# Altium PCB ADAS_ECU_MB_revA.PcbDoc (part 6 of 6)
Units mm, origin at the board's own origin, x right, y up, seen from the top; angles counter-clockwise.
Board outline 180 x 120 mm, 6 copper layers (Top Layer, Mid Layer 1, Mid Layer 2, Mid Layer 3, Mid Layer 4, Bottom Layer), stack 1.554 mm thick; 648 components, 505 nets, 4389 pads, 80 vias.
Unrouted connection lines stored in the file: 197.
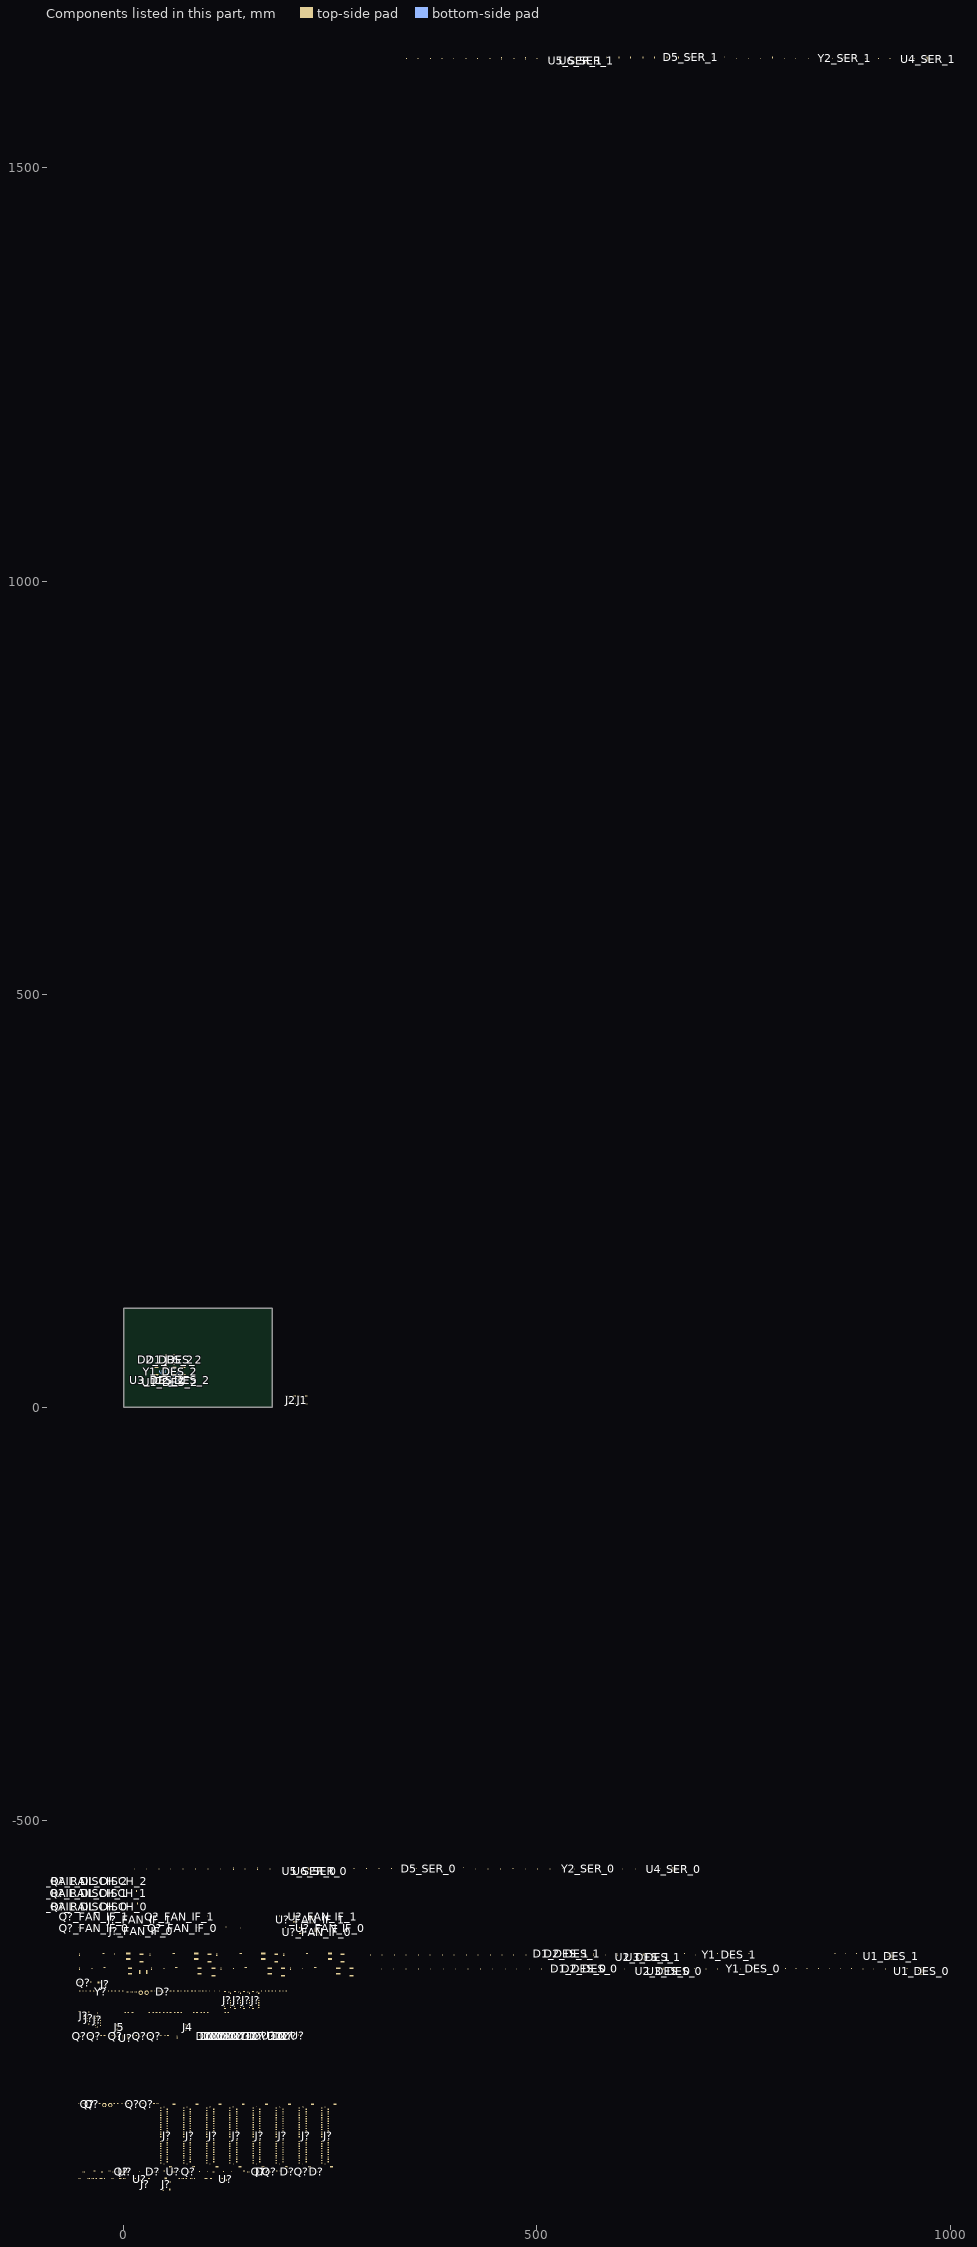
[diagram p5: the components of this part, seen from the top]

## Via types
v1: diameter 0.5, hole 0.2, Top Layer to Bottom Layer, 66 vias
v2: diameter 0.5, hole 0.3, Top Layer to Bottom Layer, 12 vias
v3: diameter 0.75, hole 0.5, Top Layer to Bottom Layer, 2 vias

## Nets (pads, with @x,y where several pads share a name; then routed paths per layer and width w, separated by ;. In a path a pad name is that pad's centre, name@x,y a point inside that pad or via, vN(x,y) a via of type N, cw(c..) or ccw(c..) an arc to the next point about the centre after c; other vN are vias at no path point) (continued)
pads on no net: C?.1@1.15,-732.081 C?.1@5.15,-732.081 C?.1@10.15,-732.081 C?.1@30.15,-732.081 C?.1@35.15,-732.081 C?.1@39.15,-732.081 C?.1@43.15,-732.081 C?.1@48.15,-732.081 C?.1@52.15,-732.081 C?.1@56.15,-732.081 C?.1@61.15,-732.081 C?.1@65.15,-732.081 C?.1@69.15,-732.081 C?.1@84.15,-732.081 C?.1@88.15,-732.081 C?.1@89.166,-932.081 C?.1@93.15,-732.081 C?.1@94.166,-932.081 C?.1@97.15,-732.081 C?.1@101.15,-732.081 C?.1@122.15,-732.081 C?.1@126.15,-732.081 C?.1@171.228,-924.081 C?.1@210.228,-924.081 C?.1@-10.834,-932.081 C?.2@2.107,-732.081 C?.2@6.107,-732.081 C?.2@11.107,-732.081 C?.2@31.107,-732.081 C?.2@36.107,-732.081 C?.2@40.107,-732.081 C?.2@44.107,-732.081 C?.2@49.107,-732.081 C?.2@53.107,-732.081 C?.2@57.107,-732.081 C?.2@62.107,-732.081 C?.2@66.107,-732.081 C?.2@70.107,-732.081 C?.2@75.995,-933.081 C?.2@85.107,-732.081 C?.2@85.995,-933.081 C?.2@89.107,-732.081 C?.2@94.107,-732.081 C?.2@98.107,-732.081 C?.2@102.107,-732.081 C?.2@123.107,-732.081 C?.2@127.107,-732.081 C?.2@137.058,-924.081 C?.2@175.995,-706.081 C?.2@183.995,-706.081 C?.2@188.995,-706.081 C?.2@196.995,-706.081 C?.2@-23.005,-933.081 C?_FAN_IF_0.2@177.628,-630.714 C?_FAN_IF_1.2@170.628,-616.714 D1_DES_0.2 D1_DES_0.4 D1_DES_0.7 D1_DES_0.9 D1_DES_1.2 D1_DES_1.4 D1_DES_1.7 D1_DES_1.9 D1_DES_2.2 D1_DES_2.4 D1_DES_2.7 D1_DES_2.9 D2_DES_0.2 D2_DES_0.4 D2_DES_0.7 D2_DES_0.9 D2_DES_1.2 D2_DES_1.4 D2_DES_1.7 D2_DES_1.9 D2_DES_2.2 D2_DES_2.4 D2_DES_2.7 D2_DES_2.9 D5_SER_0.2 D5_SER_0.4 D5_SER_0.5 D5_SER_0.6 D5_SER_0.7 D5_SER_0.9 D5_SER_1.2 D5_SER_1.4 D5_SER_1.5 D5_SER_1.6 D5_SER_1.7 D5_SER_1.9 D?.1@109.211,-760.081 D?.1@131.211,-760.081 D?.1@139.211,-760.081 D?.1@144.211,-760.081 D?.2@109.211,-760.581 D?.2@131.211,-760.581 D?.2@144.211,-760.581 D?.3@36.578,-925.081 D?.4@131.211,-761.581 D?.5@126.211,-762.081 D?.5@139.211,-762.081 D?.6@127.046,-762.081 D?.6@140.046,-762.081 D?.7@132.046,-761.581 D?.9@110.046,-760.581 D?.9@132.046,-760.581 D?.9@145.046,-760.581 D?.10@110.046,-760.081 D?.10@132.046,-760.081 D?.10@140.046,-760.081 D?.10@145.046,-760.081 FB?.2@18.628,-923.681 FB?.2@29.628,-923.681 FB?.2@52.628,-923.681 FB?.2@67.628,-923.681 FB?.2@91.628,-923.681 FB?.2@120.628,-923.681 FB?.2@130.628,-923.681 J?. J?.01 J?.1@72.528,-847.706 J?.1@100.528,-847.706 J?.1@128.528,-847.706 J?.1@133.728,-726.331 J?.1@144.728,-726.331 J?.1@155.728,-726.331 J?.1@156.528,-847.706 J?.1@184.528,-847.706 J?.1@212.528,-847.706 J?.1@239.528,-847.706 J?.02 J?.2@52.728,-847.956 J?.2@108.728,-847.956 J?.2@129.278,-726.081 J?.2@136.728,-847.956 J?.2@152.278,-726.081 J?.2@163.278,-726.081 J?.2@164.728,-847.956 J?.2@192.728,-847.956 J?.2@220.728,-847.956 J?.2@247.728,-847.956 J?.2@-23.197,-698.731 J?.03 J?.3@72.528,-848.206 J?.3@100.528,-848.206 J?.3@128.528,-848.206 J?.3@133.728,-725.831 J?.3@144.728,-725.831 J?.3@155.728,-725.831 J?.3@156.528,-848.206 J?.3@184.528,-848.206 J?.3@212.528,-848.206 J?.3@239.528,-848.206 J?.3@-23.197,-698.081 J?.3@-44.452,-735.871 J?.3@-48.372,-734.811 J?.04 J?.4@52.728,-848.456 J?.4@108.728,-848.456 J?.4@129.278,-725.581 J?.4@136.728,-848.456 J?.4@152.278,-725.581 J?.4@163.278,-725.581 J?.4@164.728,-848.456 J?.4@192.728,-848.456 J?.4@220.728,-848.456 J?.4@247.728,-848.456 J?.4@-23.197,-697.431 J?.4@-48.372,-732.271 J?.05 J?.5@72.528,-848.706 J?.5@100.528,-848.706 J?.5@128.528,-848.706 J?.5@133.728,-725.331 J?.5@144.728,-725.331 J?.5@155.728,-725.331 J?.5@156.528,-848.706 J?.5@184.528,-848.706 J?.5@212.528,-848.706 J?.5@239.528,-848.706 J?.06 J?.6@52.728,-848.956 J?.6@108.728,-848.956 J?.6@129.278,-725.081 J?.6@136.728,-848.956 J?.6@141.278,-725.081 J?.6@152.278,-725.081 J?.6@163.278,-725.081 J?.6@164.728,-848.956 J?.6@192.728,-848.956 J?.6@220.728,-848.956 J?.6@247.728,-848.956 J?.07 J?.7@72.528,-849.206 J?.7@100.528,-849.206 J?.7@128.528,-849.206 J?.7@133.728,-724.831 J?.7@144.728,-724.831 J?.7@155.728,-724.831 J?.7@156.528,-849.206 J?.7@184.528,-849.206 J?.7@212.528,-849.206 J?.7@239.528,-849.206 J?.08 J?.8@52.728,-849.456 J?.8@108.728,-849.456 J?.8@129.278,-724.581 J?.8@136.728,-849.456 J?.8@141.278,-724.581 J?.8@152.278,-724.581 J?.8@163.278,-724.581 J?.8@164.728,-849.456 J?.8@192.728,-849.456 J?.8@220.728,-849.456 J?.8@247.728,-849.456 J?.09 J?.9@44.528,-849.706 J?.9@72.528,-849.706 J?.9@100.528,-849.706 J?.9@128.528,-849.706 J?.9@133.728,-724.331 J?.9@144.728,-724.331 J?.9@155.728,-724.331 J?.9@156.528,-849.706 J?.9@184.528,-849.706 J?.9@212.528,-849.706 J?.9@239.528,-849.706 J?.10@52.728,-849.956 J?.10@108.728,-849.956 J?.10@129.278,-724.081 J?.10@136.728,-849.956 J?.10@152.278,-724.081 J?.10@163.278,-724.081 J?.10@164.728,-849.956 J?.10@192.728,-849.956 J?.10@220.728,-849.956 J?.10@247.728,-849.956 J?.10@-28.282,-745.331 J?.11@44.528,-850.206 J?.11@72.528,-850.206 J?.11@100.528,-850.206 J?.11@128.528,-850.206 J?.11@133.728,-723.831 J?.11@144.728,-723.831 J?.11@155.728,-723.831 J?.11@156.528,-850.206 J?.11@184.528,-850.206 J?.11@212.528,-850.206 J?.11@239.528,-850.206 J?.11@-34.462,-744.831 J?.12@52.728,-850.456 J?.12@108.728,-850.456 J?.12@129.278,-723.581 J?.12@136.728,-850.456 J?.12@152.278,-723.581 J?.12@163.278,-723.581 J?.12@164.728,-850.456 J?.12@192.728,-850.456 J?.12@220.728,-850.456 J?.12@247.728,-850.456 J?.12@-28.282,-744.831 J?.13@72.528,-850.706 J?.13@100.528,-850.706 J?.13@128.528,-850.706 J?.13@133.728,-723.331 J?.13@144.728,-723.331 J?.13@155.728,-723.331 J?.13@156.528,-850.706 J?.13@184.528,-850.706 J?.13@212.528,-850.706 J?.13@239.528,-850.706 J?.13@-34.462,-743.831 J?.14@52.728,-850.956 J?.14@108.728,-850.956 J?.14@129.278,-723.081 J?.14@136.728,-850.956 J?.14@152.278,-723.081 J?.14@163.278,-723.081 J?.14@164.728,-850.956 J?.14@192.728,-850.956 J?.14@220.728,-850.956 J?.14@247.728,-850.956 J?.14@-28.282,-743.831 J?.14@-44.452,-741.371 J?.15@72.528,-851.206 J?.15@100.528,-851.206 J?.15@128.528,-851.206 J?.15@133.728,-722.831 J?.15@144.728,-722.831 J?.15@155.728,-722.831 J?.15@156.528,-851.206 J?.15@184.528,-851.206 J?.15@212.528,-851.206 J?.15@239.528,-851.206 J?.15@-34.462,-743.331 J?.16@52.728,-851.456 J?.16@108.728,-851.456 J?.16@129.278,-722.581 J?.16@136.728,-851.456 J?.16@152.278,-722.581 J?.16@163.278,-722.581 J?.16@164.728,-851.456 J?.16@192.728,-851.456 J?.16@220.728,-851.456 J?.16@247.728,-851.456 J?.16@-28.282,-743.331 J?.17@72.528,-851.706 J?.17@100.528,-851.706 J?.17@128.528,-851.706 J?.17@133.728,-722.331 J?.17@144.728,-722.331 J?.17@155.728,-722.331 J?.17@156.528,-851.706 J?.17@184.528,-851.706 J?.17@212.528,-851.706 J?.17@239.528,-851.706 J?.17@-34.462,-742.331 J?.18@52.728,-851.956 J?.18@108.728,-851.956 J?.18@129.278,-722.081 J?.18@136.728,-851.956 J?.18@152.278,-722.081 J?.18@163.278,-722.081 J?.18@164.728,-851.956 J?.18@192.728,-851.956 J?.18@220.728,-851.956 J?.18@247.728,-851.956 J?.18@-28.282,-742.331 J?.19@72.528,-852.206 J?.19@100.528,-852.206 J?.19@128.528,-852.206 J?.19@133.728,-721.831 J?.19@144.728,-721.831 J?.19@155.728,-721.831 J?.19@156.528,-852.206 J?.19@184.528,-852.206 J?.19@212.528,-852.206 J?.19@239.528,-852.206 J?.19@-34.462,-741.831 J?.20@52.728,-852.456 J?.20@108.728,-852.456 J?.20@129.278,-721.581 J?.20@136.728,-852.456 J?.20@141.278,-721.581 J?.20@152.278,-721.581 J?.20@163.278,-721.581 J?.20@164.728,-852.456 J?.20@192.728,-852.456 J?.20@220.728,-852.456 J?.20@247.728,-852.456 J?.20@-28.282,-741.831 J?.21@72.528,-852.706 J?.21@100.528,-852.706 J?.21@128.528,-852.706 J?.21@133.728,-721.331 J?.21@144.728,-721.331 J?.21@155.728,-721.331 J?.21@156.528,-852.706 J?.21@184.528,-852.706 J?.21@212.528,-852.706 J?.21@239.528,-852.706 J?.21@-34.462,-740.831 J?.22@52.728,-852.956 J?.22@108.728,-852.956 J?.22@129.278,-721.081 J?.22@136.728,-852.956 J?.22@141.278,-721.081 J?.22@152.278,-721.081 J?.22@163.278,-721.081 J?.22@164.728,-852.956 J?.22@192.728,-852.956 J?.22@220.728,-852.956 J?.22@247.728,-852.956 J?.22@-28.282,-740.831 J?.23@72.528,-853.206 J?.23@100.528,-853.206 J?.23@128.528,-853.206 J?.23@133.728,-720.831 J?.23@144.728,-720.831 J?.23@155.728,-720.831 J?.23@156.528,-853.206 J?.23@184.528,-853.206 J?.23@212.528,-853.206 J?.23@239.528,-853.206 J?.23@-34.462,-740.331 J?.24@52.728,-853.456 J?.24@108.728,-853.456 J?.24@129.278,-720.581 J?.24@136.728,-853.456 J?.24@141.278,-720.581 J?.24@152.278,-720.581 J?.24@163.278,-720.581 J?.24@164.728,-853.456 J?.24@192.728,-853.456 J?.24@220.728,-853.456 J?.24@247.728,-853.456 J?.24@-28.282,-740.331 J?.25@72.528,-853.706 J?.25@100.528,-853.706 J?.25@128.528,-853.706 J?.25@133.728,-720.331 J?.25@144.728,-720.331 J?.25@155.728,-720.331 J?.25@156.528,-853.706 J?.25@184.528,-853.706 J?.25@212.528,-853.706 J?.25@239.528,-853.706 J?.25@-34.462,-739.331 J?.26@52.728,-853.956 J?.26@108.728,-853.956 J?.26@129.278,-720.081 J?.26@136.728,-853.956 J?.26@141.278,-720.081 J?.26@152.278,-720.081 J?.26@163.278,-720.081 J?.26@164.728,-853.956 J?.26@192.728,-853.956 J?.26@220.728,-853.956 J?.26@247.728,-853.956 J?.26@-28.282,-739.331 J?.27@44.528,-854.206 J?.27@72.528,-854.206 J?.27@100.528,-854.206 J?.27@128.528,-854.206 J?.27@133.728,-719.831 J?.27@144.728,-719.831 J?.27@155.728,-719.831 J?.27@156.528,-854.206 J?.27@184.528,-854.206 J?.27@212.528,-854.206 J?.27@239.528,-854.206 J?.27@-34.462,-738.831 J?.28@52.728,-854.456 J?.28@108.728,-854.456 J?.28@129.278,-719.581 J?.28@136.728,-854.456 J?.28@141.278,-719.581 J?.28@152.278,-719.581 J?.28@163.278,-719.581 J?.28@164.728,-854.456 J?.28@192.728,-854.456 J?.28@220.728,-854.456 J?.28@247.728,-854.456 J?.28@-28.282,-738.831 J?.29@44.528,-854.706 J?.29@72.528,-854.706 J?.29@100.528,-854.706 J?.29@128.528,-854.706 J?.29@133.728,-719.331 J?.29@144.728,-719.331 J?.29@155.728,-719.331 J?.29@156.528,-854.706 J?.29@184.528,-854.706 J?.29@212.528,-854.706 J?.29@239.528,-854.706 J?.29@-34.462,-737.831 J?.30@52.728,-854.956 J?.30@108.728,-854.956 J?.30@129.278,-719.081 J?.30@136.728,-854.956 J?.30@141.278,-719.081 J?.30@152.278,-719.081 J?.30@163.278,-719.081 J?.30@164.728,-854.956 J?.30@192.728,-854.956 J?.30@220.728,-854.956 J?.30@247.728,-854.956 J?.30@-28.282,-737.831 J?.31@72.528,-855.206 J?.31@100.528,-855.206 J?.31@128.528,-855.206 J?.31@133.728,-718.831 J?.31@144.728,-718.831 J?.31@155.728,-718.831 J?.31@156.528,-855.206 J?.31@184.528,-855.206 J?.31@212.528,-855.206 J?.31@239.528,-855.206 J?.31@-34.462,-737.331 J?.32@52.728,-855.456 J?.32@108.728,-855.456 J?.32@129.278,-718.581 J?.32@136.728,-855.456 J?.32@141.278,-718.581 J?.32@152.278,-718.581 J?.32@163.278,-718.581 J?.32@164.728,-855.456 J?.32@192.728,-855.456 J?.32@220.728,-855.456 J?.32@247.728,-855.456 J?.32@-28.282,-737.331 J?.33@72.528,-855.706 J?.33@100.528,-855.706 J?.33@128.528,-855.706 J?.33@133.728,-718.331 J?.33@144.728,-718.331 J?.33@155.728,-718.331 J?.33@156.528,-855.706 J?.33@184.528,-855.706 J?.33@212.528,-855.706 J?.33@239.528,-855.706 J?.33@-34.462,-736.331 J?.34@52.728,-855.956 J?.34@108.728,-855.956 J?.34@129.278,-718.081 J?.34@136.728,-855.956 J?.34@141.278,-718.081 J?.34@152.278,-718.081 J?.34@163.278,-718.081 J?.34@164.728,-855.956 J?.34@192.728,-855.956 J?.34@220.728,-855.956 J?.34@247.728,-855.956 J?.34@-28.282,-736.331 J?.35@72.528,-856.206 J?.35@100.528,-856.206 J?.35@128.528,-856.206 J?.35@133.728,-717.831 J?.35@144.728,-717.831 J?.35@155.728,-717.831 J?.35@156.528,-856.206 J?.35@184.528,-856.206 J?.35@212.528,-856.206 J?.35@239.528,-856.206 J?.35@-34.462,-735.831 J?.36@52.728,-856.456 J?.36@108.728,-856.456 J?.36@129.278,-717.581 J?.36@136.728,-856.456 J?.36@141.278,-717.581 J?.36@152.278,-717.581 J?.36@163.278,-717.581 J?.36@164.728,-856.456 J?.36@192.728,-856.456 J?.36@220.728,-856.456 J?.36@247.728,-856.456 J?.36@-28.282,-735.831 J?.37@72.528,-856.706 J?.37@100.528,-856.706 J?.37@121.728,-717.331 J?.37@128.528,-856.706 J?.37@133.728,-717.331 J?.37@155.728,-717.331 J?.37@156.528,-856.706 J?.37@184.528,-856.706 J?.37@212.528,-856.706 J?.37@239.528,-856.706 J?.37@-34.462,-734.831 J?.38@52.728,-856.956 J?.38@108.728,-856.956 J?.38@129.278,-717.081 J?.38@136.728,-856.956 J?.38@141.278,-717.081 J?.38@152.278,-717.081 J?.38@163.278,-717.081 J?.38@164.728,-856.956 J?.38@192.728,-856.956 J?.38@220.728,-856.956 J?.38@247.728,-856.956 J?.38@-28.282,-734.831 J?.39@44.528,-857.206 J?.39@72.528,-857.206 J?.39@100.528,-857.206 J?.39@121.728,-716.831 J?.39@128.528,-857.206 J?.39@133.728,-716.831 J?.39@155.728,-716.831 J?.39@156.528,-857.206 J?.39@184.528,-857.206 J?.39@212.528,-857.206 J?.39@239.528,-857.206 J?.39@-34.462,-734.331 J?.40@52.728,-857.456 J?.40@80.728,-857.456 J?.40@108.728,-857.456 J?.40@129.278,-716.581 J?.40@136.728,-857.456 J?.40@141.278,-716.581 J?.40@152.278,-716.581 J?.40@164.728,-857.456 J?.40@192.728,-857.456 J?.40@220.728,-857.456 J?.40@247.728,-857.456 J?.40@-28.282,-734.331 J?.41@44.528,-857.706 J?.41@72.528,-857.706 J?.41@100.528,-857.706 J?.41@121.728,-716.331 J?.41@128.528,-857.706 J?.41@133.728,-716.331 J?.41@155.728,-716.331 J?.41@156.528,-857.706 J?.41@184.528,-857.706 J?.41@212.528,-857.706 J?.41@239.528,-857.706 J?.42@52.728,-857.956 J?.42@80.728,-857.956 J?.42@108.728,-857.956 J?.42@129.278,-716.081 J?.42@136.728,-857.956 J?.42@141.278,-716.081 J?.42@152.278,-716.081 J?.42@164.728,-857.956 J?.42@192.728,-857.956 J?.42@220.728,-857.956 J?.42@247.728,-857.956 J?.43@72.528,-858.206 J?.43@100.528,-858.206 J?.43@121.728,-715.831 J?.43@128.528,-858.206 J?.43@133.728,-715.831 J?.43@155.728,-715.831 J?.43@156.528,-858.206 J?.43@184.528,-858.206 J?.43@212.528,-858.206 J?.43@239.528,-858.206 J?.44@52.728,-858.456 J?.44@108.728,-858.456 J?.44@129.278,-715.581 J?.44@136.728,-858.456 J?.44@141.278,-715.581 J?.44@152.278,-715.581 J?.44@164.728,-858.456 J?.44@192.728,-858.456 J?.44@220.728,-858.456 J?.44@247.728,-858.456 J?.45@44.528,-858.706 J?.45@72.528,-858.706 J?.45@100.528,-858.706 J?.45@121.728,-715.331 J?.45@128.528,-858.706 J?.45@133.728,-715.331 J?.45@155.728,-715.331 J?.45@156.528,-858.706 J?.45@184.528,-858.706 J?.45@212.528,-858.706 J?.45@239.528,-858.706 J?.46 J?.47@44.528,-859.206 J?.47@72.528,-859.206 J?.47@100.528,-859.206 J?.47@121.728,-714.831 J?.47@128.528,-859.206 J?.47@133.728,-714.831 J?.47@155.728,-714.831 J?.47@156.528,-859.206 J?.47@184.528,-859.206 J?.47@212.528,-859.206 J?.47@239.528,-859.206 J?.48 J?.49@72.528,-859.706 J?.49@100.528,-859.706 J?.49@121.728,-714.331 J?.49@128.528,-859.706 J?.49@133.728,-714.331 J?.49@155.728,-714.331 J?.49@156.528,-859.706 J?.49@184.528,-859.706 J?.49@212.528,-859.706 J?.49@239.528,-859.706 J?.50@52.728,-859.956 J?.50@108.728,-859.956 J?.50@129.278,-714.081 J?.50@136.728,-859.956 J?.50@141.278,-714.081 J?.50@152.278,-714.081 J?.50@164.728,-859.956 J?.50@192.728,-859.956 J?.50@220.728,-859.956 J?.50@247.728,-859.956 J?.51@44.528,-860.206 J?.51@72.528,-860.206 J?.51@100.528,-860.206 J?.51@121.728,-713.831 J?.51@128.528,-860.206 J?.51@133.728,-713.831 J?.51@155.728,-713.831 J?.51@156.528,-860.206 J?.51@184.528,-860.206 J?.51@212.528,-860.206 J?.51@239.528,-860.206 J?.52@52.728,-860.456 J?.52@80.728,-860.456 J?.52@108.728,-860.456 J?.52@129.278,-713.581 J?.52@136.728,-860.456 J?.52@141.278,-713.581 J?.52@152.278,-713.581 J?.52@164.728,-860.456 J?.52@192.728,-860.456 J?.52@220.728,-860.456 J?.52@247.728,-860.456 J?.53@44.528,-860.706 J?.53@72.528,-860.706 J?.53@100.528,-860.706 J?.53@121.728,-713.331 J?.53@128.528,-860.706 J?.53@133.728,-713.331 J?.53@155.728,-713.331 J?.53@156.528,-860.706 J?.53@184.528,-860.706 J?.53@212.528,-860.706 J?.53@239.528,-860.706 J?.54@52.728,-860.956 J?.54@80.728,-860.956 J?.54@108.728,-860.956 J?.54@129.278,-713.081 J?.54@136.728,-860.956 J?.54@141.278,-713.081 J?.54@152.278,-713.081 J?.54@164.728,-860.956 J?.54@192.728,-860.956 J?.54@220.728,-860.956 J?.54@247.728,-860.956 J?.55@72.528,-861.206 J?.55@100.528,-861.206 J?.55@121.728,-712.831 J?.55@128.528,-861.206 J?.55@133.728,-712.831 J?.55@155.728,-712.831 J?.55@156.528,-861.206 J?.55@184.528,-861.206 J?.55@212.528,-861.206 J?.55@239.528,-861.206 J?.56@52.728,-861.456 J?.56@108.728,-861.456 J?.56@129.278,-712.581 J?.56@136.728,-861.456 J?.56@141.278,-712.581 J?.56@152.278,-712.581 J?.56@163.278,-712.581 J?.56@164.728,-861.456 J?.56@192.728,-861.456 J?.56@220.728,-861.456 J?.56@247.728,-861.456 J?.57@44.528,-861.706 J?.57@72.528,-861.706 J?.57@100.528,-861.706 J?.57@121.728,-712.331 J?.57@128.528,-861.706 J?.57@133.728,-712.331 J?.57@155.728,-712.331 J?.57@156.528,-861.706 J?.57@184.528,-861.706 J?.57@212.528,-861.706 J?.57@239.528,-861.706 J?.58 J?.59 J?.60 J?.61@72.528,-862.706 J?.61@100.528,-862.706 J?.61@128.528,-862.706 J?.61@156.528,-862.706 J?.61@184.528,-862.706 J?.61@212.528,-862.706 J?.61@239.528,-862.706 J?.62@52.728,-862.956 J?.62@108.728,-862.956 J?.62@136.728,-862.956 J?.62@164.728,-862.956 J?.62@192.728,-862.956 J?.62@220.728,-862.956 J?.62@247.728,-862.956 J?.63@72.528,-863.206 J?.63@100.528,-863.206 J?.63@128.528,-863.206 J?.63@156.528,-863.206 J?.63@184.528,-863.206 J?.63@212.528,-863.206 J?.63@239.528,-863.206 J?.64 J?.65@72.528,-863.706 J?.65@100.528,-863.706 J?.65@128.528,-863.706 J?.65@156.528,-863.706 J?.65@184.528,-863.706 J?.65@212.528,-863.706 J?.65@239.528,-863.706 J?.66 J?.67@72.528,-864.206 J?.67@100.528,-864.206 J?.67@121.728,-709.831 J?.67@128.528,-864.206 J?.67@133.728,-709.831 J?.67@144.728,-709.831 J?.67@155.728,-709.831 J?.67@156.528,-864.206 J?.67@184.528,-864.206 J?.67@212.528,-864.206 J?.67@239.528,-864.206 J?.68@52.728,-864.456 J?.68@108.728,-864.456 J?.68@129.278,-709.581 J?.68@136.728,-864.456 J?.68@141.278,-709.581 J?.68@152.278,-709.581 J?.68@164.728,-864.456 J?.68@192.728,-864.456 J?.68@220.728,-864.456 J?.68@247.728,-864.456 J?.69@72.528,-864.706 J?.69@100.528,-864.706 J?.69@121.728,-709.331 J?.69@128.528,-864.706 J?.69@133.728,-709.331 J?.69@144.728,-709.331 J?.69@155.728,-709.331 J?.69@156.528,-864.706 J?.69@184.528,-864.706 J?.69@212.528,-864.706 J?.69@239.528,-864.706 J?.70@52.728,-864.956 J?.70@80.728,-864.956 J?.70@108.728,-864.956 J?.70@129.278,-709.081 J?.70@136.728,-864.956 J?.70@141.278,-709.081 J?.70@152.278,-709.081 J?.70@164.728,-864.956 J?.70@192.728,-864.956 J?.70@220.728,-864.956 J?.70@247.728,-864.956 J?.71@72.528,-865.206 J?.71@100.528,-865.206 J?.71@121.728,-708.831 J?.71@128.528,-865.206 J?.71@133.728,-708.831 J?.71@155.728,-708.831 J?.71@156.528,-865.206 J?.71@184.528,-865.206 J?.71@212.528,-865.206 J?.71@239.528,-865.206 J?.72@52.728,-865.456 J?.72@80.728,-865.456 J?.72@108.728,-865.456 J?.72@129.278,-708.581 J?.72@136.728,-865.456 J?.72@141.278,-708.581 J?.72@152.278,-708.581 J?.72@164.728,-865.456 J?.72@192.728,-865.456 J?.72@220.728,-865.456 J?.72@247.728,-865.456 J?.73@72.528,-865.706 J?.73@100.528,-865.706 J?.73@121.728,-708.331 J?.73@128.528,-865.706 J?.73@133.728,-708.331 J?.73@155.728,-708.331 J?.73@156.528,-865.706 J?.73@184.528,-865.706 J?.73@212.528,-865.706 J?.73@239.528,-865.706 J?.74@52.728,-865.956 J?.74@108.728,-865.956 J?.74@129.278,-708.081 J?.74@136.728,-865.956 J?.74@141.278,-708.081 J?.74@152.278,-708.081 J?.74@164.728,-865.956 J?.74@192.728,-865.956 J?.74@220.728,-865.956 J?.74@247.728,-865.956 J?.75@72.528,-866.206 J?.75@100.528,-866.206 J?.75@121.728,-707.831 J?.75@128.528,-866.206 J?.75@133.728,-707.831 J?.75@155.728,-707.831 J?.75@156.528,-866.206 J?.75@184.528,-866.206 J?.75@212.528,-866.206 J?.75@239.528,-866.206 J?.76@52.728,-866.456 J?.76@80.728,-866.456 J?.76@108.728,-866.456 J?.76@122.503,-727.431 J?.76@134.503,-727.431 J?.76@136.728,-866.456 J?.76@145.503,-727.431 J?.76@164.728,-866.456 J?.76@192.728,-866.456 J?.76@220.728,-866.456 J?.76@247.728,-866.456 J?.77@72.528,-866.706 J?.77@100.528,-866.706 J?.77@122.503,-706.731 J?.77@128.528,-866.706 J?.77@134.503,-706.731 J?.77@156.503,-706.731 J?.77@156.528,-866.706 J?.77@184.528,-866.706 J?.77@212.528,-866.706 J?.77@239.528,-866.706 J?.78 J?.79@72.528,-867.206 J?.79@100.528,-867.206 J?.79@128.528,-867.206 J?.79@156.528,-867.206 J?.79@184.528,-867.206 J?.79@212.528,-867.206 J?.79@239.528,-867.206 J?.80@52.728,-867.456 J?.80@108.728,-867.456 J?.80@136.728,-867.456 J?.80@164.728,-867.456 J?.80@192.728,-867.456 J?.80@220.728,-867.456 J?.80@247.728,-867.456 J?.81@44.528,-867.706 J?.81@72.528,-867.706 J?.81@128.528,-867.706 J?.81@156.528,-867.706 J?.81@184.528,-867.706 J?.81@212.528,-867.706 J?.81@239.528,-867.706 J?.82 J?.83@44.528,-868.206 J?.83@72.528,-868.206 J?.83@128.528,-868.206 J?.83@156.528,-868.206 J?.83@184.528,-868.206 J?.83@212.528,-868.206 J?.83@239.528,-868.206 J?.84 J?.85@44.528,-868.706 J?.85@72.528,-868.706 J?.85@128.528,-868.706 J?.85@156.528,-868.706 J?.85@184.528,-868.706 J?.85@212.528,-868.706 J?.85@239.528,-868.706 J?.86@52.728,-868.956 J?.86@80.728,-868.956 J?.86@108.728,-868.956 J?.86@164.728,-868.956 J?.86@192.728,-868.956 J?.86@220.728,-868.956 J?.86@247.728,-868.956 J?.87@44.528,-869.206 J?.87@72.528,-869.206 J?.87@128.528,-869.206 J?.87@156.528,-869.206 J?.87@184.528,-869.206 J?.87@212.528,-869.206 J?.87@239.528,-869.206 J?.88 J?.89 J?.90 J?.91 J?.92 J?.93 J?.94 J?.95 J?.96@52.728,-871.456 J?.96@80.728,-871.456 J?.96@108.728,-871.456 J?.96@164.728,-871.456 J?.96@192.728,-871.456 J?.96@220.728,-871.456 J?.96@247.728,-871.456 J?.97 J?.98@52.728,-871.956 J?.98@80.728,-871.956 J?.98@108.728,-871.956 J?.98@164.728,-871.956 J?.98@192.728,-871.956 J?.98@220.728,-871.956 J?.98@247.728,-871.956 J?.99 J?.100 J?.101 J?.102@52.728,-872.956 J?.102@80.728,-872.956 J?.102@108.728,-872.956 J?.102@164.728,-872.956 J?.102@192.728,-872.956 J?.102@220.728,-872.956 J?.102@247.728,-872.956 J?.103 J?.104@52.728,-873.456 J?.104@80.728,-873.456 J?.104@108.728,-873.456 J?.104@164.728,-873.456 J?.104@192.728,-873.456 J?.104@220.728,-873.456 J?.104@247.728,-873.456 J?.105 J?.106@52.728,-873.956 J?.106@80.728,-873.956 J?.106@108.728,-873.956 J?.106@164.728,-873.956 J?.106@192.728,-873.956 J?.106@220.728,-873.956 J?.106@247.728,-873.956 J?.107@44.528,-874.206 J?.107@72.528,-874.206 J?.107@128.528,-874.206 J?.107@156.528,-874.206 J?.107@184.528,-874.206 J?.107@212.528,-874.206 J?.107@239.528,-874.206 J?.108@52.728,-874.456 J?.108@80.728,-874.456 J?.108@108.728,-874.456 J?.108@164.728,-874.456 J?.108@192.728,-874.456 J?.108@220.728,-874.456 J?.108@247.728,-874.456 J?.109@44.528,-874.706 J?.109@72.528,-874.706 J?.109@128.528,-874.706 J?.109@156.528,-874.706 J?.109@184.528,-874.706 J?.109@212.528,-874.706 J?.109@239.528,-874.706 J?.110@52.728,-874.956 J?.110@80.728,-874.956 J?.110@108.728,-874.956 J?.110@164.728,-874.956 J?.110@192.728,-874.956 J?.110@220.728,-874.956 J?.110@247.728,-874.956 J?.111@44.528,-875.206 J?.111@72.528,-875.206 J?.111@128.528,-875.206 J?.111@156.528,-875.206 J?.111@184.528,-875.206 J?.111@212.528,-875.206 J?.111@239.528,-875.206 J?.112@52.728,-875.456 J?.112@80.728,-875.456 J?.112@108.728,-875.456 J?.112@164.728,-875.456 J?.112@192.728,-875.456 J?.112@220.728,-875.456 J?.112@247.728,-875.456 J?.113@44.528,-875.706 J?.113@72.528,-875.706 J?.113@128.528,-875.706 J?.113@156.528,-875.706 J?.113@184.528,-875.706 J?.113@212.528,-875.706 J?.113@239.528,-875.706 J?.114@52.728,-875.956 J?.114@80.728,-875.956 J?.114@108.728,-875.956 J?.114@164.728,-875.956 J?.114@192.728,-875.956 J?.114@220.728,-875.956 J?.114@247.728,-875.956 J?.115@44.528,-876.206 J?.115@72.528,-876.206 J?.115@128.528,-876.206 J?.115@156.528,-876.206 J?.115@184.528,-876.206 J?.115@212.528,-876.206 J?.115@239.528,-876.206 J?.116 J?.117@44.528,-876.706 J?.117@72.528,-876.706 J?.117@128.528,-876.706 J?.117@156.528,-876.706 J?.117@184.528,-876.706 J?.117@212.528,-876.706 J?.117@239.528,-876.706 J?.118@52.728,-876.956 J?.118@80.728,-876.956 J?.118@108.728,-876.956 J?.118@164.728,-876.956 J?.118@192.728,-876.956 J?.118@220.728,-876.956 J?.118@247.728,-876.956 J?.119@44.528,-877.206 J?.119@72.528,-877.206 J?.119@128.528,-877.206 J?.119@156.528,-877.206 J?.119@184.528,-877.206 J?.119@212.528,-877.206 J?.119@239.528,-877.206 J?.120@52.728,-877.456 J?.120@80.728,-877.456 J?.120@108.728,-877.456 J?.120@164.728,-877.456 J?.120@192.728,-877.456 J?.120@220.728,-877.456 J?.120@247.728,-877.456 J?.121 J?.122 J?.123 J?.124@52.728,-878.456 J?.124@80.728,-878.456 J?.124@108.728,-878.456 J?.124@164.728,-878.456 J?.124@192.728,-878.456 J?.124@220.728,-878.456 J?.124@247.728,-878.456 J?.125@44.528,-878.706 J?.125@72.528,-878.706 J?.125@128.528,-878.706 J?.125@156.528,-878.706 J?.125@184.528,-878.706 J?.125@212.528,-878.706 J?.125@239.528,-878.706 J?.126@52.728,-878.956 J?.126@80.728,-878.956 J?.126@108.728,-878.956 J?.126@164.728,-878.956 J?.126@192.728,-878.956 J?.126@220.728,-878.956 J?.126@247.728,-878.956 J?.127@44.528,-879.206 J?.127@72.528,-879.206 J?.127@128.528,-879.206 J?.127@156.528,-879.206 J?.127@184.528,-879.206 J?.127@212.528,-879.206 J?.127@239.528,-879.206 J?.128@52.728,-879.456 J?.128@80.728,-879.456 J?.128@108.728,-879.456 J?.128@164.728,-879.456 J?.128@192.728,-879.456 J?.128@220.728,-879.456 J?.128@247.728,-879.456 J?.129@44.528,-879.706 J?.129@72.528,-879.706 J?.129@128.528,-879.706 J?.129@156.528,-879.706 J?.129@184.528,-879.706 J?.129@212.528,-879.706 J?.129@239.528,-879.706 J?.130@52.728,-879.956 J?.130@80.728,-879.956 J?.130@108.728,-879.956 J?.130@164.728,-879.956 J?.130@192.728,-879.956 J?.130@220.728,-879.956 J?.130@247.728,-879.956 J?.131@44.528,-880.206 J?.131@72.528,-880.206 J?.131@128.528,-880.206 J?.131@156.528,-880.206 J?.131@184.528,-880.206 J?.131@212.528,-880.206 J?.131@239.528,-880.206 J?.132@52.728,-880.456 J?.132@80.728,-880.456 J?.132@108.728,-880.456 J?.132@164.728,-880.456 J?.132@192.728,-880.456 J?.132@220.728,-880.456 J?.132@247.728,-880.456 J?.133@44.528,-880.706 J?.133@72.528,-880.706 J?.133@128.528,-880.706 J?.133@156.528,-880.706 J?.133@184.528,-880.706 J?.133@212.528,-880.706 J?.133@239.528,-880.706 J?.134 J?.135@44.528,-881.206 J?.135@72.528,-881.206 J?.135@128.528,-881.206 J?.135@156.528,-881.206 J?.135@184.528,-881.206 J?.135@212.528,-881.206 J?.135@239.528,-881.206 J?.136 J?.137@44.528,-881.706 J?.137@72.528,-881.706 J?.137@128.528,-881.706 J?.137@156.528,-881.706 J?.137@184.528,-881.706 J?.137@212.528,-881.706 J?.137@239.528,-881.706 J?.138@52.728,-881.956 J?.138@80.728,-881.956 J?.138@108.728,-881.956 J?.138@164.728,-881.956 J?.138@192.728,-881.956 J?.138@220.728,-881.956 J?.138@247.728,-881.956 J?.139@44.528,-882.206 J?.139@72.528,-882.206 J?.139@128.528,-882.206 J?.139@156.528,-882.206 J?.139@184.528,-882.206 J?.139@212.528,-882.206 J?.139@239.528,-882.206 J?.140 J?.141@44.528,-882.706 J?.141@72.528,-882.706 J?.141@128.528,-882.706 J?.141@156.528,-882.706 J?.141@184.528,-882.706 J?.141@212.528,-882.706 J?.141@239.528,-882.706 J?.142@52.728,-882.956 J?.142@80.728,-882.956 J?.142@108.728,-882.956 J?.142@164.728,-882.956 J?.142@192.728,-882.956 J?.142@220.728,-882.956 J?.142@247.728,-882.956 J?.143@44.528,-883.206 J?.143@72.528,-883.206 J?.143@128.528,-883.206 J?.143@156.528,-883.206 J?.143@184.528,-883.206 J?.143@212.528,-883.206 J?.143@239.528,-883.206 J?.144@52.728,-883.456 J?.144@80.728,-883.456 J?.144@108.728,-883.456 J?.144@164.728,-883.456 J?.144@192.728,-883.456 J?.144@220.728,-883.456 J?.144@247.728,-883.456 J?.145@44.528,-885.706 J?.145@72.528,-885.706 J?.145@128.528,-885.706 J?.145@156.528,-885.706 J?.145@184.528,-885.706 J?.145@212.528,-885.706 J?.145@239.528,-885.706 J?.146@52.728,-885.956 J?.146@80.728,-885.956 J?.146@108.728,-885.956 J?.146@164.728,-885.956 J?.146@192.728,-885.956 J?.146@220.728,-885.956 J?.146@247.728,-885.956 J?.147@44.528,-886.206 J?.147@72.528,-886.206 J?.147@128.528,-886.206 J?.147@156.528,-886.206 J?.147@184.528,-886.206 J?.147@212.528,-886.206 J?.147@239.528,-886.206 J?.148@52.728,-886.456 J?.148@80.728,-886.456 J?.148@108.728,-886.456 J?.148@164.728,-886.456 J?.148@192.728,-886.456 J?.148@220.728,-886.456 J?.148@247.728,-886.456 J?.149@44.528,-886.706 J?.149@72.528,-886.706 J?.149@128.528,-886.706 J?.149@156.528,-886.706 J?.149@184.528,-886.706 J?.149@212.528,-886.706 J?.149@239.528,-886.706 J?.150@52.728,-886.956 J?.150@80.728,-886.956 J?.150@108.728,-886.956 J?.150@164.728,-886.956 J?.150@192.728,-886.956 J?.150@220.728,-886.956 J?.150@247.728,-886.956 J?.151@44.528,-887.206 J?.151@72.528,-887.206 J?.151@128.528,-887.206 J?.151@156.528,-887.206 J?.151@184.528,-887.206 J?.151@212.528,-887.206 J?.151@239.528,-887.206 J?.152@52.728,-887.456 J?.152@80.728,-887.456 J?.152@108.728,-887.456 J?.152@164.728,-887.456 J?.152@192.728,-887.456 J?.152@220.728,-887.456 J?.152@247.728,-887.456 J?.153@44.528,-887.706 J?.153@72.528,-887.706 J?.153@128.528,-887.706 J?.153@156.528,-887.706 J?.153@184.528,-887.706 J?.153@212.528,-887.706 J?.153@239.528,-887.706 J?.154@52.728,-887.956 J?.154@80.728,-887.956 J?.154@108.728,-887.956 J?.154@164.728,-887.956 J?.154@192.728,-887.956 J?.154@220.728,-887.956 J?.154@247.728,-887.956 J?.155@44.528,-888.206 J?.155@72.528,-888.206 J?.155@128.528,-888.206 J?.155@156.528,-888.206 J?.155@184.528,-888.206 J?.155@212.528,-888.206 J?.155@239.528,-888.206 J?.156 J?.157@44.528,-888.706 J?.157@72.528,-888.706 J?.157@128.528,-888.706 J?.157@156.528,-888.706 J?.157@184.528,-888.706 J?.157@212.528,-888.706 J?.157@239.528,-888.706 J?.158@52.728,-888.956 J?.158@80.728,-888.956 J?.158@108.728,-888.956 J?.158@164.728,-888.956 J?.158@192.728,-888.956 J?.158@220.728,-888.956 J?.158@247.728,-888.956 J?.159@44.528,-889.206 J?.159@72.528,-889.206 J?.159@128.528,-889.206 J?.159@156.528,-889.206 J?.159@184.528,-889.206 J?.159@212.528,-889.206 J?.159@239.528,-889.206 J?.160 J?.161@44.528,-889.706 J?.161@72.528,-889.706 J?.161@100.528,-889.706 J?.161@128.528,-889.706 J?.161@184.528,-889.706 J?.161@212.528,-889.706 J?.161@239.528,-889.706 J?.162 J?.163@44.528,-890.206 J?.163@72.528,-890.206 J?.163@100.528,-890.206 J?.163@128.528,-890.206 J?.163@184.528,-890.206 J?.163@212.528,-890.206 J?.163@239.528,-890.206 J?.164@52.728,-890.456 J?.164@80.728,-890.456 J?.164@108.728,-890.456 J?.164@136.728,-890.456 J?.164@164.728,-890.456 J?.164@220.728,-890.456 J?.164@247.728,-890.456 J?.165@44.528,-890.706 J?.165@72.528,-890.706 J?.165@100.528,-890.706 J?.165@128.528,-890.706 J?.165@184.528,-890.706 J?.165@212.528,-890.706 J?.165@239.528,-890.706 J?.166@52.728,-890.956 J?.166@80.728,-890.956 J?.166@108.728,-890.956 J?.166@136.728,-890.956 J?.166@164.728,-890.956 J?.166@220.728,-890.956 J?.166@247.728,-890.956 J?.167 J?.168@52.728,-891.456 J?.168@80.728,-891.456 J?.168@108.728,-891.456 J?.168@136.728,-891.456 J?.168@164.728,-891.456 J?.168@220.728,-891.456 J?.168@247.728,-891.456 J?.169 J?.170@52.728,-891.956 J?.170@80.728,-891.956 J?.170@108.728,-891.956 J?.170@136.728,-891.956 J?.170@164.728,-891.956 J?.170@220.728,-891.956 J?.170@247.728,-891.956 J?.171@44.528,-892.206 J?.171@72.528,-892.206 J?.171@100.528,-892.206 J?.171@128.528,-892.206 J?.171@184.528,-892.206 J?.171@212.528,-892.206 J?.171@239.528,-892.206 J?.172 J?.173 J?.174 J?.175 J?.176@52.728,-893.456 J?.176@80.728,-893.456 J?.176@108.728,-893.456 J?.176@136.728,-893.456 J?.176@164.728,-893.456 J?.176@220.728,-893.456 J?.176@247.728,-893.456 J?.177@44.528,-893.706 J?.177@72.528,-893.706 J?.177@100.528,-893.706 J?.177@128.528,-893.706 J?.177@184.528,-893.706 J?.177@212.528,-893.706 J?.177@239.528,-893.706 J?.178@52.728,-893.956 J?.178@80.728,-893.956 J?.178@108.728,-893.956 J?.178@136.728,-893.956 J?.178@164.728,-893.956 J?.178@220.728,-893.956 J?.178@247.728,-893.956 J?.179@44.528,-894.206 J?.179@72.528,-894.206 J?.179@100.528,-894.206 J?.179@128.528,-894.206 J?.179@184.528,-894.206 J?.179@212.528,-894.206 J?.179@239.528,-894.206 J?.180@52.728,-894.456 J?.180@80.728,-894.456 J?.180@108.728,-894.456 J?.180@136.728,-894.456 J?.180@164.728,-894.456 J?.180@220.728,-894.456 J?.180@247.728,-894.456 J?.181@44.528,-894.706 J?.181@72.528,-894.706 J?.181@100.528,-894.706 J?.181@128.528,-894.706 J?.181@184.528,-894.706 J?.181@212.528,-894.706 J?.181@239.528,-894.706 J?.182 J?.183 J?.184@52.728,-895.456 J?.184@80.728,-895.456 J?.184@108.728,-895.456 J?.184@136.728,-895.456 J?.184@164.728,-895.456 J?.184@220.728,-895.456 J?.184@247.728,-895.456 J?.185@44.528,-895.706 J?.185@72.528,-895.706 J?.185@100.528,-895.706 J?.185@128.528,-895.706 J?.185@184.528,-895.706 J?.185@212.528,-895.706 J?.185@239.528,-895.706 J?.186@52.728,-895.956 J?.186@80.728,-895.956 J?.186@108.728,-895.956 J?.186@136.728,-895.956 J?.186@164.728,-895.956 J?.186@220.728,-895.956 J?.186@247.728,-895.956 J?.187@44.528,-896.206 J?.187@72.528,-896.206 J?.187@100.528,-896.206 J?.187@128.528,-896.206 J?.187@184.528,-896.206 J?.187@212.528,-896.206 J?.187@239.528,-896.206 J?.188@52.728,-896.456 J?.188@80.728,-896.456 J?.188@108.728,-896.456 J?.188@136.728,-896.456 J?.188@164.728,-896.456 J?.188@220.728,-896.456 J?.188@247.728,-896.456 J?.189@44.528,-896.706 J?.189@72.528,-896.706 J?.189@100.528,-896.706 J?.189@128.528,-896.706 J?.189@184.528,-896.706 J?.189@212.528,-896.706 J?.189@239.528,-896.706 J?.190@52.728,-896.956 J?.190@80.728,-896.956 J?.190@108.728,-896.956 J?.190@136.728,-896.956 J?.190@164.728,-896.956 J?.190@220.728,-896.956 J?.190@247.728,-896.956 J?.191@44.528,-897.206 J?.191@72.528,-897.206 J?.191@100.528,-897.206 J?.191@128.528,-897.206 J?.191@184.528,-897.206 J?.191@212.528,-897.206 J?.191@239.528,-897.206 J?.192@52.728,-897.456 J?.192@80.728,-897.456 J?.192@108.728,-897.456 J?.192@136.728,-897.456 J?.192@164.728,-897.456 J?.192@220.728,-897.456 J?.192@247.728,-897.456 J?.193@44.528,-897.706 J?.193@72.528,-897.706 J?.193@100.528,-897.706 J?.193@128.528,-897.706 J?.193@184.528,-897.706 J?.193@212.528,-897.706 J?.193@239.528,-897.706 J?.194@52.728,-897.956 J?.194@80.728,-897.956 J?.194@108.728,-897.956 J?.194@136.728,-897.956 J?.194@164.728,-897.956 J?.194@220.728,-897.956 J?.194@247.728,-897.956 J?.195@44.528,-898.206 J?.195@72.528,-898.206 J?.195@100.528,-898.206 J?.195@128.528,-898.206 J?.195@184.528,-898.206 J?.195@212.528,-898.206 J?.195@239.528,-898.206 J?.196@52.728,-898.456 J?.196@80.728,-898.456 J?.196@108.728,-898.456 J?.196@136.728,-898.456 J?.196@164.728,-898.456 J?.196@220.728,-898.456 J?.196@247.728,-898.456 J?.197@44.528,-898.706 J?.197@72.528,-898.706 J?.197@100.528,-898.706 J?.197@128.528,-898.706 J?.197@184.528,-898.706 J?.197@212.528,-898.706 J?.197@239.528,-898.706 J?.198@52.728,-898.956 J?.198@80.728,-898.956 J?.198@108.728,-898.956 J?.198@136.728,-898.956 J?.198@164.728,-898.956 J?.198@220.728,-898.956 J?.198@247.728,-898.956 J?.199@44.528,-899.206 J?.199@72.528,-899.206 J?.199@100.528,-899.206 J?.199@128.528,-899.206 J?.199@184.528,-899.206 J?.199@212.528,-899.206 J?.199@239.528,-899.206 J?.200@52.728,-899.456 J?.200@80.728,-899.456 J?.200@108.728,-899.456 J?.200@136.728,-899.456 J?.200@164.728,-899.456 J?.200@220.728,-899.456 J?.200@247.728,-899.456 J?.201@44.528,-899.706 J?.201@72.528,-899.706 J?.201@100.528,-899.706 J?.201@128.528,-899.706 J?.201@184.528,-899.706 J?.201@212.528,-899.706 J?.201@239.528,-899.706 J?.202@52.728,-899.956 J?.202@80.728,-899.956 J?.202@108.728,-899.956 J?.202@136.728,-899.956 J?.202@164.728,-899.956 J?.202@220.728,-899.956 J?.202@247.728,-899.956 J?.203 J?.204@52.728,-900.456 J?.204@80.728,-900.456 J?.204@108.728,-900.456 J?.204@136.728,-900.456 J?.204@164.728,-900.456 J?.204@220.728,-900.456 J?.204@247.728,-900.456 J?.205 J?.206@52.728,-900.956 J?.206@80.728,-900.956 J?.206@108.728,-900.956 J?.206@136.728,-900.956 J?.206@164.728,-900.956 J?.206@220.728,-900.956 J?.206@247.728,-900.956 J?.207 J?.208@52.728,-901.456 J?.208@80.728,-901.456 J?.208@108.728,-901.456 J?.208@136.728,-901.456 J?.208@164.728,-901.456 J?.208@220.728,-901.456 J?.208@247.728,-901.456 J?.209 J?.210@52.728,-901.956 J?.210@80.728,-901.956 J?.210@108.728,-901.956 J?.210@136.728,-901.956 J?.210@164.728,-901.956 J?.210@220.728,-901.956 J?.210@247.728,-901.956 J?.211@44.528,-902.206 J?.211@72.528,-902.206 J?.211@100.528,-902.206 J?.211@128.528,-902.206 J?.211@184.528,-902.206 J?.211@212.528,-902.206 J?.211@239.528,-902.206 J?.212@52.728,-902.456 J?.212@80.728,-902.456 J?.212@108.728,-902.456 J?.212@136.728,-902.456 J?.212@164.728,-902.456 J?.212@220.728,-902.456 J?.212@247.728,-902.456 J?.213@44.528,-902.706 J?.213@72.528,-902.706 J?.213@100.528,-902.706 J?.213@128.528,-902.706 J?.213@184.528,-902.706 J?.213@212.528,-902.706 J?.213@239.528,-902.706 J?.214@52.728,-902.956 J?.214@80.728,-902.956 J?.214@108.728,-902.956 J?.214@136.728,-902.956 J?.214@164.728,-902.956 J?.214@220.728,-902.956 J?.214@247.728,-902.956 J?.215@44.528,-903.206 J?.215@72.528,-903.206 J?.215@100.528,-903.206 J?.215@128.528,-903.206 J?.215@184.528,-903.206 J?.215@212.528,-903.206 J?.215@239.528,-903.206 J?.216@52.728,-903.456 J?.216@80.728,-903.456 J?.216@108.728,-903.456 J?.216@136.728,-903.456 J?.216@164.728,-903.456 J?.216@220.728,-903.456 J?.216@247.728,-903.456 J?.217@44.528,-903.706 J?.217@72.528,-903.706 J?.217@100.528,-903.706 J?.217@128.528,-903.706 J?.217@184.528,-903.706 J?.217@212.528,-903.706 J?.217@239.528,-903.706 J?.218@52.728,-903.956 J?.218@80.728,-903.956 J?.218@108.728,-903.956 J?.218@136.728,-903.956 J?.218@164.728,-903.956 J?.218@220.728,-903.956 J?.218@247.728,-903.956 J?.219 J?.220 J?.221 J?.222 J?.223 J?.224 J?.225 J?.226 J?.227 J?.228@52.728,-906.456 J?.228@80.728,-906.456 J?.228@108.728,-906.456 J?.228@136.728,-906.456 J?.228@164.728,-906.456 J?.228@220.728,-906.456 J?.228@247.728,-906.456 J?.229 J?.230@52.728,-906.956 J?.230@80.728,-906.956 J?.230@108.728,-906.956 J?.230@136.728,-906.956 J?.230@164.728,-906.956 J?.230@220.728,-906.956 J?.230@247.728,-906.956 J?.231@44.528,-907.206 J?.231@72.528,-907.206 J?.231@100.528,-907.206 J?.231@128.528,-907.206 J?.231@184.528,-907.206 J?.231@212.528,-907.206 J?.231@239.528,-907.206 J?.232 J?.233@44.528,-907.706 J?.233@72.528,-907.706 J?.233@100.528,-907.706 J?.233@128.528,-907.706 J?.233@184.528,-907.706 J?.233@212.528,-907.706 J?.233@239.528,-907.706 J?.234 J?.235@44.528,-908.206 J?.235@72.528,-908.206 J?.235@100.528,-908.206 J?.235@128.528,-908.206 J?.235@184.528,-908.206 J?.235@212.528,-908.206 J?.235@239.528,-908.206 J?.236@52.728,-908.456 J?.236@80.728,-908.456 J?.236@108.728,-908.456 J?.236@136.728,-908.456 J?.236@164.728,-908.456 J?.236@220.728,-908.456 J?.236@247.728,-908.456 J?.237@44.528,-908.706 J?.237@72.528,-908.706 J?.237@100.528,-908.706 J?.237@128.528,-908.706 J?.237@184.528,-908.706 J?.237@212.528,-908.706 J?.237@239.528,-908.706 J?.238@52.728,-908.956 J?.238@80.728,-908.956 J?.238@108.728,-908.956 J?.238@136.728,-908.956 J?.238@164.728,-908.956 J?.238@220.728,-908.956 J?.238@247.728,-908.956 J?.239@44.528,-909.206 J?.239@72.528,-909.206 J?.239@100.528,-909.206 J?.239@128.528,-909.206 J?.239@184.528,-909.206 J?.239@212.528,-909.206 J?.239@239.528,-909.206 J?.240@52.728,-909.456 J?.240@80.728,-909.456 J?.240@108.728,-909.456 J?.240@136.728,-909.456 J?.240@164.728,-909.456 J?.240@220.728,-909.456 J?.240@247.728,-909.456 J?.241@44.528,-909.706 J?.241@72.528,-909.706 J?.241@100.528,-909.706 J?.241@128.528,-909.706 J?.241@156.528,-909.706 J?.241@184.528,-909.706 J?.241@239.528,-909.706 J?.242@52.728,-909.956 J?.242@80.728,-909.956 J?.242@108.728,-909.956 J?.242@136.728,-909.956 J?.242@164.728,-909.956 J?.242@192.728,-909.956 J?.242@220.728,-909.956 J?.243@44.528,-910.206 J?.243@72.528,-910.206 J?.243@100.528,-910.206 J?.243@128.528,-910.206 J?.243@156.528,-910.206 J?.243@184.528,-910.206 J?.243@239.528,-910.206 J?.244@52.728,-910.456 J?.244@80.728,-910.456 J?.244@108.728,-910.456 J?.244@136.728,-910.456 J?.244@164.728,-910.456 J?.244@192.728,-910.456 J?.244@220.728,-910.456 J?.245@44.528,-910.706 J?.245@72.528,-910.706 J?.245@100.528,-910.706 J?.245@128.528,-910.706 J?.245@156.528,-910.706 J?.245@184.528,-910.706 J?.245@239.528,-910.706 J?.246@52.728,-910.956 J?.246@80.728,-910.956 J?.246@108.728,-910.956 J?.246@136.728,-910.956 J?.246@164.728,-910.956 J?.246@192.728,-910.956 J?.246@220.728,-910.956 J?.247@44.528,-911.206 J?.247@72.528,-911.206 J?.247@100.528,-911.206 J?.247@128.528,-911.206 J?.247@156.528,-911.206 J?.247@184.528,-911.206 J?.247@239.528,-911.206 J?.248@52.728,-911.456 J?.248@80.728,-911.456 J?.248@108.728,-911.456 J?.248@136.728,-911.456 J?.248@164.728,-911.456 J?.248@192.728,-911.456 J?.248@220.728,-911.456 J?.249@44.528,-911.706 J?.249@72.528,-911.706 J?.249@100.528,-911.706 J?.249@128.528,-911.706 J?.249@156.528,-911.706 J?.249@184.528,-911.706 J?.249@239.528,-911.706 J?.250@52.728,-911.956 J?.250@80.728,-911.956 J?.250@108.728,-911.956 J?.250@136.728,-911.956 J?.250@164.728,-911.956 J?.250@192.728,-911.956 J?.250@220.728,-911.956 J?.251@44.528,-912.206 J?.251@72.528,-912.206 J?.251@100.528,-912.206 J?.251@128.528,-912.206 J?.251@156.528,-912.206 J?.251@184.528,-912.206 J?.251@239.528,-912.206 J?.252@52.728,-912.456 J?.252@80.728,-912.456 J?.252@108.728,-912.456 J?.252@136.728,-912.456 J?.252@164.728,-912.456 J?.252@192.728,-912.456 J?.252@220.728,-912.456 J?.253@44.528,-912.706 J?.253@72.528,-912.706 J?.253@100.528,-912.706 J?.253@128.528,-912.706 J?.253@156.528,-912.706 J?.253@184.528,-912.706 J?.253@239.528,-912.706 J?.254@52.728,-912.956 J?.254@80.728,-912.956 J?.254@108.728,-912.956 J?.254@136.728,-912.956 J?.254@164.728,-912.956 J?.254@192.728,-912.956 J?.254@220.728,-912.956 J?.255@44.528,-913.206 J?.255@72.528,-913.206 J?.255@100.528,-913.206 J?.255@128.528,-913.206 J?.255@156.528,-913.206 J?.255@184.528,-913.206 J?.255@239.528,-913.206 J?.256@52.728,-913.456 J?.256@80.728,-913.456 J?.256@108.728,-913.456 J?.256@136.728,-913.456 J?.256@164.728,-913.456 J?.256@192.728,-913.456 J?.256@220.728,-913.456 J?.257@44.528,-913.706 J?.257@72.528,-913.706 J?.257@100.528,-913.706 J?.257@128.528,-913.706 J?.257@156.528,-913.706 J?.257@184.528,-913.706 J?.257@239.528,-913.706 J?.258@52.728,-913.956 J?.258@80.728,-913.956 J?.258@108.728,-913.956 J?.258@136.728,-913.956 J?.258@164.728,-913.956 J?.258@192.728,-913.956 J?.258@220.728,-913.956 J?.259@44.528,-914.206 J?.259@72.528,-914.206 J?.259@100.528,-914.206 J?.259@128.528,-914.206 J?.259@156.528,-914.206 J?.259@184.528,-914.206 J?.259@239.528,-914.206 J?.260@52.728,-914.456 J?.260@80.728,-914.456 J?.260@108.728,-914.456 J?.260@136.728,-914.456 J?.260@164.728,-914.456 J?.260@192.728,-914.456 J?.260@220.728,-914.456 J?.261@56.628,-918.831 J?.261@84.628,-918.831 J?.261@112.628,-918.831 J?.261@140.628,-918.831 J?.261@168.628,-918.831 J?.261@196.628,-918.831 J?.261@251.628,-918.831 J?.262@60.628,-843.331 J?.262@88.628,-843.331 J?.262@116.628,-843.331 J?.262@144.628,-843.331 J?.262@172.628,-843.331 J?.262@200.628,-843.331 J?.262@228.628,-843.331 J?.G1 J?.G2 J?.G3 J?.G4 J?.MH J?_FAN_IF_0. J?_FAN_IF_1. Q?.1@162.678,-924.431 Q?.1@-39.322,-842.431 Q?.2@214.678,-925.731 Q?.2@-39.322,-843.081 Q?.3@11.578,-843.081 Q?.3@20.578,-761.081 Q?.3@28.578,-843.081 Q?.3@37.578,-761.081 Q?.3@79.578,-925.081 Q?.3@177.578,-925.081 Q?.3@216.578,-925.081 Q?.3@-8.422,-761.081 Q?.3@-44.322,-843.731 Q?.3@-47.422,-696.081 Q?.3@-52.422,-761.081 Q?.4@-42.422,-843.731 Q?.5@-42.422,-843.081 Q?.6@-37.422,-842.431 Q?_RAIL_DISCH_0.1@-30.022,-605.03 Q?_RAIL_DISCH_0.2@-29.372,-605.03 Q?_RAIL_DISCH_0.3@-52.722,-605.03 Q?_RAIL_DISCH_0.4@-52.722,-603.13 Q?_RAIL_DISCH_0.5@-53.372,-603.13 Q?_RAIL_DISCH_0.6@-30.022,-603.13 Q?_RAIL_DISCH_1.1@-31.022,-589.03 Q?_RAIL_DISCH_1.2@-30.372,-589.03 Q?_RAIL_DISCH_1.3@-52.722,-589.03 Q?_RAIL_DISCH_1.4@-52.722,-587.13 Q?_RAIL_DISCH_1.5@-53.372,-587.13 Q?_RAIL_DISCH_1.6@-31.022,-587.13 Q?_RAIL_DISCH_2.1@-30.022,-574.03 Q?_RAIL_DISCH_2.2@-29.372,-574.03 Q?_RAIL_DISCH_2.3@-52.722,-574.03 Q?_RAIL_DISCH_2.4@-52.722,-572.13 Q?_RAIL_DISCH_2.5@-53.372,-572.13 Q?_RAIL_DISCH_2.6@-30.022,-572.13 R?.1@10.128,-924.081 R?.1@12.878,-933.081 R?.1@13.978,-760.081 R?.1@14.003,-842.081 R?.1@22.978,-842.081 R?.1@23.003,-760.081 R?.1@30.978,-760.081 R?.1@31.003,-842.081 R?.1@39.903,-925.081 R?.1@39.978,-842.081 R?.1@40.003,-760.081 R?.1@48.978,-760.081 R?.1@87.128,-924.081 R?.1@104.878,-933.081 R?.1@154.128,-924.081 R?.1@158.903,-925.081 R?.1@180.128,-924.081 R?.1@189.003,-924.081 R?.1@219.128,-924.081 R?.1@223.978,-924.081 R?.1@228.003,-924.081 R?.1@-0.122,-933.081 R?.1@-5.997,-760.081 R?.1@-8.097,-925.081 R?.1@-40.097,-695.081 R?.1@-41.022,-760.081 R?.1@-44.872,-695.081 R?.1@-44.872,-924.081 R?.1@-49.997,-760.081 R?.2@9.053,-932.081 R?.2@15.141,-924.081 R?.2@24.253,-760.081 R?.2@26.141,-924.081 R?.2@41.253,-760.081 R?.2@45.141,-924.081 R?.2@57.128,-706.081 R?.2@61.128,-706.081 R?.2@64.141,-924.081 R?.2@70.128,-706.081 R?.2@74.128,-706.081 R?.2@78.128,-706.081 R?.2@83.141,-924.081 R?.2@87.128,-706.081 R?.2@109.053,-932.081 R?.2@114.053,-932.081 R?.2@117.141,-924.081 R?.2@127.141,-924.081 R?.2@151.353,-925.081 R?.2@160.353,-925.081 R?.2@-4.747,-760.081 R?.2@-30.747,-760.081 R?.2@-31.872,-706.081 R?.2@-34.747,-924.081 R?.2@-39.872,-706.081 R?.2@-43.872,-695.081 R?.2@-44.872,-706.081 R?.2@-47.647,-925.081 R?.2@-48.747,-760.081 R?.2@-52.872,-706.081 R?_FAN_IF_0.1@123.628,-629.58 R?_FAN_IF_0.1@265.628,-629.58 R?_FAN_IF_0.2@195.628,-629.355 R?_FAN_IF_1.1@118.628,-615.58 R?_FAN_IF_1.1@256.628,-615.58 R?_FAN_IF_1.2@188.628,-615.355 U1_DES_0.1 U1_DES_0.2 U1_DES_0.3 U1_DES_0.12 U1_DES_0.26 U1_DES_0.27 U1_DES_0.33 U1_DES_0.34 U1_DES_0.51 U1_DES_0.52 U1_DES_1.1 U1_DES_1.2 U1_DES_1.3 U1_DES_1.12 U1_DES_1.26 U1_DES_1.27 U1_DES_1.33 U1_DES_1.34 U1_DES_1.51 U1_DES_1.52 U1_DES_2.1 U1_DES_2.2 U1_DES_2.3 U1_DES_2.12 U1_DES_2.26 U1_DES_2.27 U1_DES_2.33 U1_DES_2.34 U1_DES_2.51 U1_DES_2.52 U4_SER_0.2 U4_SER_0.7 U4_SER_0.17 U4_SER_0.18 U4_SER_0.21 U4_SER_0.22 U4_SER_1.2 U4_SER_1.7 U4_SER_1.17 U4_SER_1.18 U4_SER_1.21 U4_SER_1.22 U?.1@0.503,-924.431 U?.1@58.503,-924.431 U?.1@174.858,-759.431 U?.1@209.858,-759.431 U?.5@2.753,-925.081 U?.5@18.878,-935.506 U?.5@122.878,-935.506 U?.6 U?.7 U?.8@124.378,-935.506 U?.9@21.053,-934.831 U?.10 U?.12 U?.13 U?_FAN_IF_0.1@248.978,-631.205 U?_FAN_IF_0.3@235.908,-638.28 U?_FAN_IF_0.4@250.278,-628.955 U?_FAN_IF_1.1@239.978,-617.205 U?_FAN_IF_1.3@227.908,-623.28 U?_FAN_IF_1.4@241.278,-614.955 Y?.1 Y?.3

## Silkscreen, mask and mechanical layers (free items; w line width, h text height)
Mechanical 1:
  lines w0.15: 0,5 ccw(c5,5) 5,0 45,0 ccw(c45,5) 50,5 50,6 cw(c60,6) 70,6 70,5 ccw(c75,5) 75,0 120,0 ccw(c120,5) 125,5 125,6 cw(c135,6) 145,6 145,5 ccw(c150,5) 150,0 175,0 ccw(c175,5) 180,5 180,120 0,120 0,5